# EAGLE board 3D_PCB (EAGLE 9.7.0)
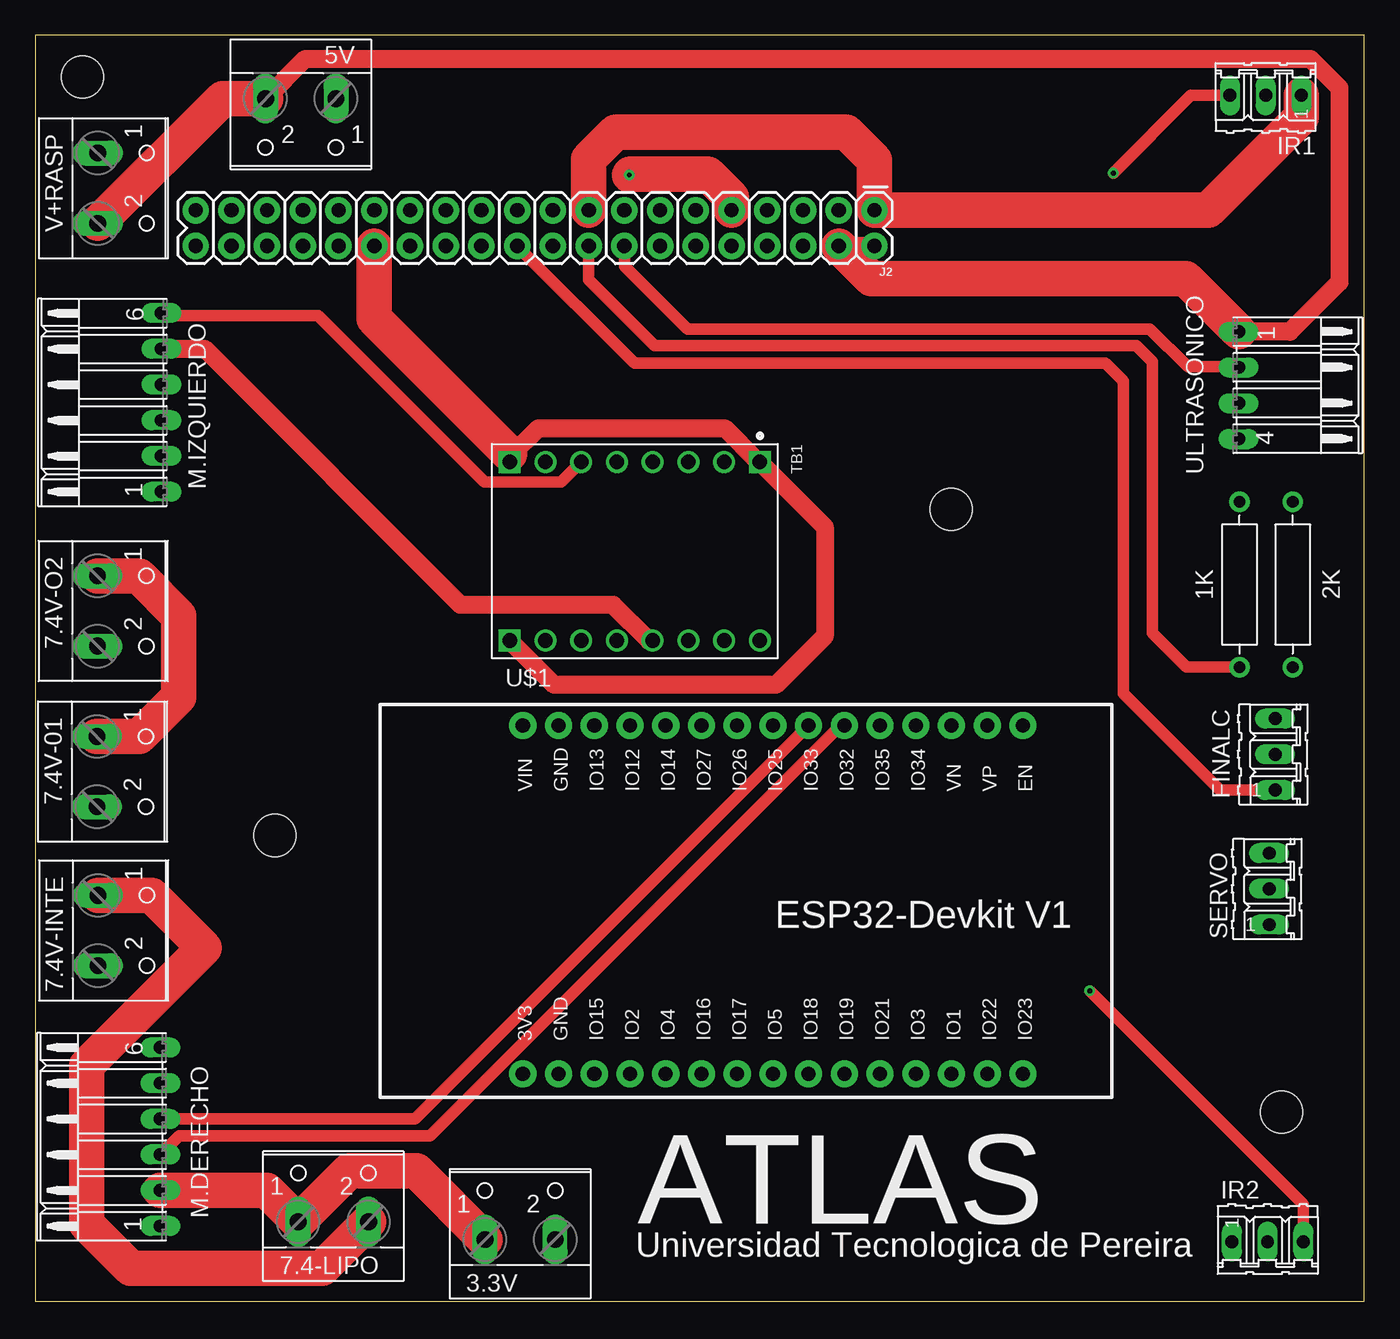
[diagram p0: board, top side]
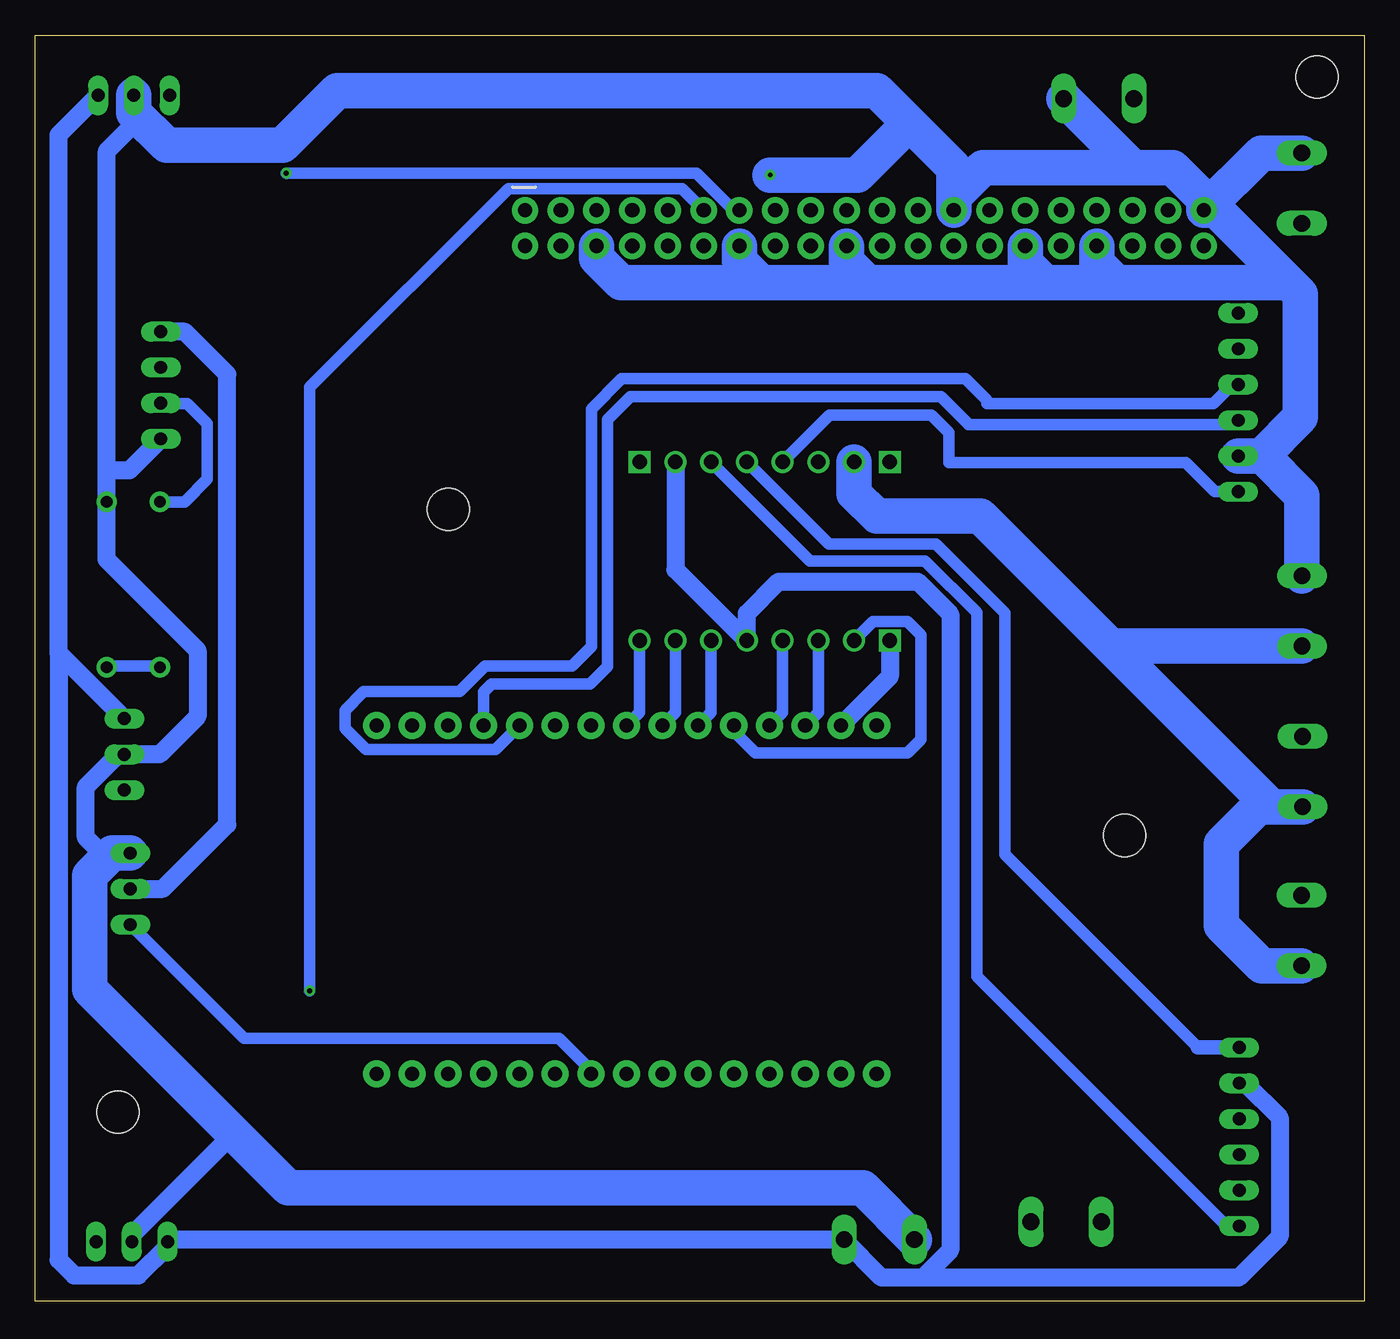
[diagram p1: board, bottom side, seen from below]

Size 94.5 x 90 mm. Coordinates in mm from the lower left corner, seen from the top.
Outline: 0,0 94.5,0 94.5,90 0,90 0,0
Copper layers (1*16): Top 0.035mm / dielectric 1.5mm / Bottom 0.035mm
Design rules "Fusion Electronics Design Rules": minimum track width 6mil, minimum drill 0.35mm, track to track 0.3mm, track to pad 6mil, pad to pad 6mil, via to via 6mil, smd to smd 6mil, copper to edge 40mil, drill to drill 6mil, minimum pad ring 10mil, minimum via ring 8mil, stop-mask expansion 4mil, vias tented up to drill 9999mil, thermal gap 10mil
Holes 3 mm at 3.36,87.04 65.12,56.3 88.62,13.42 17.04,33.1

## Footprints (pad centres in the part's own frame; a part is rotated, then mirrored left to right if it is on the bottom)
RESAD1176W63L850D250B = drill 0.83 pad 1.43: 1 -5.88,0; 2 5.88,0
W237-102 = drill 1.194 long: 1 -2.5,-1.27; 2 2.5,-1.27
03P = drill 0.914 long: 1 -2.54,0; 2 0,0; 3 2.54,0
2X20 = drill 1.016 pad 1.88: 1 0,0; 2 0,2.54; 3 2.54,0; 4 2.54,2.54; 5 5.08,0; 6 5.08,2.54; 7 7.62,0; 8 7.62,2.54; 9 10.16,0; 10 10.16,2.54; 11 12.7,0; 12 12.7,2.54; 13 15.24,0; 14 15.24,2.54; 15 17.78,0; 16 17.78,2.54; 17 20.32,0; 18 20.32,2.54; 19 22.86,0; 20 22.86,2.54; 21 25.4,0; 22 25.4,2.54; 23 27.94,0; 24 27.94,2.54; 25 30.48,0; 26 30.48,2.54; 27 33.02,0; 28 33.02,2.54; 29 35.56,0; 30 35.56,2.54; 31 38.1,0; 32 38.1,2.54; 33 40.64,0; 34 40.64,2.54; 35 43.18,0; 36 43.18,2.54; 37 45.72,0; 38 45.72,2.54; 39 48.26,0; 40 48.26,2.54
06PA = drill 0.914 long: 1 -6.35,0; 2 -3.81,0; 3 -1.27,0; 4 1.27,0; 5 3.81,0; 6 6.35,0
SHIELD_POLOLU-713 = drill 1.04 square: 1 -6.35,8.89; 8 -6.35,-8.89; 9 6.35,-8.89 | drill 1.04: 2 -6.35,6.35; 3 -6.35,3.81; 4 -6.35,1.27; 5 -6.35,-1.27; 6 -6.35,-3.81; 7 -6.35,-6.35; 10 6.35,-6.35; 11 6.35,-3.81; 12 6.35,-1.27; 13 6.35,1.27; 14 6.35,3.81; 15 6.35,6.35; 16 6.35,8.89
ESP32-DEVKITV1 = drill 1 pad 1.93: 1 -22.87,-13.54; 2 -20.33,-13.54; 3 -17.79,-13.54; 4 -15.25,-13.54; 5 -12.71,-13.54; 6 -10.17,-13.54; 7 -7.63,-13.54; 8 -5.09,-13.54; 9 -2.55,-13.54; 10 -0.01,-13.54; 11 2.53,-13.54; 12 5.07,-13.54; 13 7.61,-13.54; 14 10.15,-13.54; 15 12.69,-13.54; 16 12.69,11.23; 17 10.15,11.23; 18 7.61,11.23; 19 5.07,11.23; 20 2.53,11.23; 21 -0.01,11.23; 22 -2.55,11.23; 23 -5.09,11.23; 24 -7.63,11.23; 25 -10.17,11.23; 26 -12.71,11.23; 27 -15.25,11.23; 28 -17.79,11.23; 29 -20.33,11.23; 30 -22.87,11.23
04PA = drill 0.914 long: 1 -3.81,0; 2 -1.27,0; 3 1.27,0; 4 3.81,0

## Placement (x,y rotation side)
1K  [RESAD1176W63L850D250B]  89.41,50.94 90 top
2K  [RESAD1176W63L850D250B]  85.63,50.94 270 top
3.3V  [W237-102]  34.48,5.64 0 top
5V  [W237-102]  18.88,84.22 180 top
7.4-LIPO  [W237-102]  21.2,6.9 0 top
7.4V-01  [W237-102]  5.66,37.64 270 top
7.4V-INTE  [W237-102]  5.74,26.34 270 top
7.4V-O2  [W237-102]  5.7,49.06 270 top
FINALC  [03P]  88.16,38.87 90 top
IR1  [03P]  87.49,85.72 180 top
IR2  [03P]  87.62,4.22 0 top
J2  RASPBERRYPI-40-PIN-GPIO_PTH_NO_SHROUD  [2X20]  59.67,77.55 180 top
M.DERECHO  [06PA]  8.9,11.68 90 top
M.IZQUIERDO  [06PA]  8.97,63.89 90 top
SERVO  [03P]  87.73,29.3 90 top
TB1  POLOLU-713  [SHIELD_POLOLU-713]  42.63,53.31 270 top
U$1  ESP32DEVKITV1  [ESP32-DEVKITV1]  57.54,29.7 0 top
ULTRASONICO  [04PA]  85.57,65.11 270 top
V+RASP  [W237-102]  5.72,79.12 270 top

## Library data of the parts
1K 2K = Resistor; CATEGORY: Resistor; SUB-CATEGORY: Fixed
3.3V 5V 7.4-LIPO 7.4V-01 7.4V-INTE 7.4V-O2 V+RASP = con-wago-500; MPN: 237-102; OC_FARNELL: unknown; OC_NEWARK: 70K9898
FINALC IR1 IR2 M.DERECHO M.IZQUIERDO SERVO ULTRASONICO = con-amp-quick; OC_FARNELL: unknown; OC_NEWARK: unknown
J2 = SparkFun-Connectors
TB1 = POLOLU-713; AVAILABILITY: Not in stock; CHECK_PRICES: https://www.snapeda.com/parts/POLOLU-713/Pololu/view-part/?ref=eda; DESCRIPTION: DC-motor driver; IC: TB6612FNG; 100kHz; 1A; Uin mot: 4.5; MF: Pololu; MP: POLOLU-713; PACKAGE: None; PRICE: None; SNAPEDA_LINK: https://www.snapeda.com/parts/POLOLU-713/Pololu/view-part/?ref=snap
U$1 = BibliotecaESP32

## Nets
3.3V: 3.3V.2 FINALC.3 IR1.1 IR2.1 J2.1 J2.17 M.DERECHO.5 M.IZQUIERDO.5 TB1.2 TB1.13
5V: 5V.2 J2.2 J2.4 SERVO.2 ULTRASONICO.1 V+RASP.2
7.4V: 7.4-LIPO.2 7.4V-INTE.1
EGND: 1K.2 3.3V.1 5V.1 7.4-LIPO.1 7.4V-01.1 7.4V-O2.1 FINALC.2 IR1.2 IR2.2 J2.6 J2.9 J2.14 J2.20 J2.25 J2.30 J2.34 J2.39 M.DERECHO.2 M.IZQUIERDO.2 SERVO.3 TB1.1 TB1.8 TB1.9 U$1.29 ULTRASONICO.4 V+RASP.1
M.DERECHO2: 7.4V-01.2 7.4V-INTE.2 7.4V-O2.2 TB1.7
N$2: TB1.16 U$1.23
N$3: TB1.10 U$1.26
N$4: TB1.11 U$1.28
N$5: TB1.12 U$1.27
N$6: TB1.15 U$1.24
N$8: TB1.14 U$1.25
N$9: M.DERECHO.1 TB1.3
N$10: M.DERECHO.6 TB1.4
N$11: M.IZQUIERDO.6 TB1.6
N$12: M.IZQUIERDO.1 TB1.5
N$13: M.DERECHO.3 U$1.21
N$14: M.DERECHO.4 U$1.22
N$15: M.IZQUIERDO.3 U$1.19
N$16: M.IZQUIERDO.4 U$1.20
N$17: SERVO.1 U$1.9
N$19: IR2.3 J2.11
N$20: IR1.3 J2.13
N$21: J2.16 ULTRASONICO.2
N$22: FINALC.1 J2.22
N$23: 1K.1 2K.2 J2.18
N$24: 2K.1 ULTRASONICO.3

## Tracks (layer width: path | path; a pad name or v marks a point on that pad's centre or on a via)
3.3V
  Top 1.27: TB1.13 43.64,46.96 41.1,49.5 30.24,49.5 12.04,67.7 M.IZQUIERDO.5
  Top 2.54: J2.17 39.35,81.19 41.26,83.1 57.68,83.1 59.67,81.11 J2.1 83.39,77.55 90.03,84.18 IR1.1
  Bottom 1.27: TB1.2 48.98,52 43.94,46.96 TB1.13 43.9,48.88 41.64,51.14 31.74,51.14 29.44,48.84 29.44,3.62 31.4,1.66 | 92.84,46.06 92.84,82.91 IR1.1 | 92.84,46.06 92.84,2.92 91.74,1.82 87.16,1.82 85.08,3.9 IR2.1 84.93,4.37 3.3V.2 37.01,4.34 34.33,1.66 31.4,1.66 | FINALC.3 92.81,46.06 92.84,46.06 | M.DERECHO.5 8.46,15.49 6.02,13.05 6.02,4.58 8.94,1.66 31.4,1.66
5V
  Top 1.27: 5V.2 19.21,88.32 90.66,88.32 92.72,86.26 92.72,72.42 89.21,68.92 ULTRASONICO.1 | J2.2 J2.4
  Top 2.54: V+RASP.2 13.32,85.49 5V.2 | J2.4 59.47,72.67 81.81,72.67 ULTRASONICO.1
  Bottom 1.27: SERVO.2 85.42,29.3 80.84,33.88 80.84,65.9 83.86,68.92 ULTRASONICO.1
7.4V
  Top 2.54: 7.4-LIPO.2 20.41,2.34 6.8,2.34 3.68,5.46 3.68,16.76 12.03,25.11 8.3,28.84 7.4V-INTE.1
EGND  (via drill 0.35)
  Top 1.27: 33.74,60.22 TB1.8 33.74,60.02 35.78,62.06 49.04,62.06 51.44,59.66 TB1.1 56.14,55.04 56.14,47.28 52.66,43.8 36.9,43.8 TB1.9
  Top 2.54: J2.30 24.11,69.85 33.74,60.22 | J2.9 49.51,78.43 47.84,80.1 42.28,80.1 v42.24,80.06 | 7.4V-01.1 7.4,40.14 10.22,42.96 10.22,48.72 7.38,51.56 7.4V-O2.1 | 3.3V.1 27.11,9.24 22.31,9.24 7.4-LIPO.1 16.46,7.87 M.DERECHO.2
  Bottom 0.813: 44.43,75.11 J2.14
  Bottom 1.27: TB1.9 33.74,44.4 U$1.29 | SERVO.3 89.79,31.84 90.9,32.95 90.9,36.57 88.6,38.87 FINALC.2 85.66,38.87 82.96,41.57 82.96,46.26 89.45,52.75 89.45,56.78 1K.2 89.41,59.06 | IR2.2 87.62,4.66 80.37,11.91 | 89.41,59.06 89.41,81.76 87.48,83.68 IR1.2 | ULTRASONICO.4 87.81,59.06 89.41,59.06
  Bottom 2.54: J2.6 54.59,74.15 52.86,72.42 42.9,72.42 | 16.47,80.58 27.12,80.58 29.19,78.51 J2.25 29.19,80.59 32.35,83.75 | 32.35,83.75 34.64,86.04 73.04,86.04 76.92,82.16 85.14,82.16 87.48,84.5 IR1.2 | 42.9,72.42 35.34,72.42 | 35.34,72.42 22.72,72.42 | 22.72,72.42 17.64,72.42 | J2.30 24.11,73.81 22.72,72.42 | J2.34 19.03,73.81 17.64,72.42 | J2.20 36.81,73.89 35.34,72.42 | J2.14 44.43,73.95 42.9,72.42 | V+RASP.1 7.34,81.62 J2.39 | 5V.1 16.47,80.58 | 7.4V-O2.1 4.43,57.28 7.23,60.08 M.IZQUIERDO.2 7.3,60.08 4.54,62.84 4.54,71.58 5.38,72.42 | SERVO.3 89.03,31.84 90.62,30.25 90.62,22.16 80.37,11.91 76.5,8.04 35.65,8.04 3.3V.1 | v42.24,80.06 36.04,80.06 32.35,83.75 | J2.39 11.41,78.37 13.62,80.58 16.47,80.58 | J2.39 10.51,77.55 5.38,72.42 | 17.64,72.42 5.38,72.42
M.DERECHO2
  Bottom 2.54: TB1.7 36.28,57.42 34.66,55.8 27.29,55.8 18.05,46.56 | 18.05,46.56 7.4V-O2.2 | 7.4V-INTE.2 7.3,23.84 10.18,26.72 10.18,32.5 7.54,35.14 7.4V-01.2 6.63,35.14 18.05,46.56
N$2
  Bottom 0.813: TB1.16 51.52,41.86 U$1.23
N$3
  Bottom 0.813: TB1.10 34.92,48.32 32.5,48.32 31.52,47.34 31.52,39.92 32.48,38.96 43.3,38.96 44.83,40.49 U$1.26
N$4
  Bottom 0.813: TB1.11 38.82,41.86 U$1.28
N$5
  Bottom 0.813: TB1.12 41.36,41.86 U$1.27
N$6
  Bottom 0.813: TB1.15 48.98,41.86 U$1.24
N$8
  Bottom 0.813: TB1.14 46.44,41.86 U$1.25
N$9
  Bottom 0.813: TB1.3 39.4,52.62 31.24,52.62 27.56,48.94 27.56,23.08 9.81,5.33 M.DERECHO.1
N$10
  Bottom 0.813: TB1.4 38.06,53.82 30.46,53.82 25.54,48.9 25.54,31.74 11.83,18.03
  Bottom 1.016: M.DERECHO.6 11.83,18.03
N$11
  Top 0.813: M.IZQUIERDO.6 9.15,70.06 20.12,70.06 31.96,58.22 37.38,58.22 TB1.6
N$12
  Bottom 0.813: M.IZQUIERDO.1 10.63,57.54 12.71,59.62 29.54,59.62 29.54,61.76 30.78,63 38.02,63 TB1.5
N$13
  Top 0.813: U$1.21 57.25,40.93 28.07,11.75 10.24,11.75 M.DERECHO.3
N$14
  Top 0.813: U$1.22 27.02,12.95 M.DERECHO.4
N$15
  Bottom 0.813: M.IZQUIERDO.3 9.53,62.62 9.83,62.32 28.14,62.32 28.14,62.36 30.1,64.32 52.18,64.32 53.82,62.68 53.82,45.1 55.06,43.86 62.04,43.86 62.61,43.29 U$1.19
N$16
  Bottom 0.813: U$1.20 61.78,39.22 70.98,39.22 72.48,40.72 72.48,42 71.14,43.34 64.32,43.34 62.5,45.16 56.34,45.16 54.96,46.54 54.96,63.42 52.8,65.58 28.36,65.58 26.82,64.04 26.82,63.82 10.74,63.82 9.4,65.16 M.IZQUIERDO.4
N$17
  Bottom 0.813: SERVO.1 79.63,18.66 57.26,18.66 54.99,16.39 U$1.9
N$19  (via drill 0.35)
  Top 0.813: 90.16,4.58 IR2.3 90.16,6.88 v74.98,22.06
  Bottom 0.813: J2.11 48.5,79.08 60.86,79.08 74.98,64.96 v74.98,22.06
N$20  (via drill 0.35)
  Top 0.813: IR1.3 82.17,85.72 v76.64,80.2
  Bottom 0.813: J2.13 44.47,77.59 44.87,77.59 47.48,80.2 v76.64,80.2
N$21
  Top 0.813: J2.16 41.89,73.59 46.38,69.1 79.26,69.1 81.94,66.42 85.53,66.42 ULTRASONICO.2
N$22
  Top 0.813: J2.22 42.6,66.68 76.1,66.68 77.36,65.42 77.36,43.18 84.21,36.33 FINALC.1
N$23
  Top 0.813: J2.18 39.35,72.61 44.02,67.94 78.28,67.94 79.42,66.8 79.42,47.5 81.86,45.06 2K.2
  Bottom 0.813: 1K.1 89.33,45.14 85.71,45.14 2K.2
N$24
  Bottom 0.813: ULTRASONICO.3 85.56,63.82 83.7,63.82 82.26,62.38 82.26,58.44 83.88,56.82 2K.1

## Text on the board
tPlace: ATLAS | Universidad Tecnologica de Pereira